# Altium PCB PCB.PcbDoc
Units mil, origin at the board's own origin, x right, y up, seen from the top; angles counter-clockwise.
Board outline 5702 x 1371 mil, 2 copper layers (Top Layer, Bottom Layer); 46 components, 42 nets, 193 pads, 66 vias.
Unrouted connection lines stored in the file: 2.
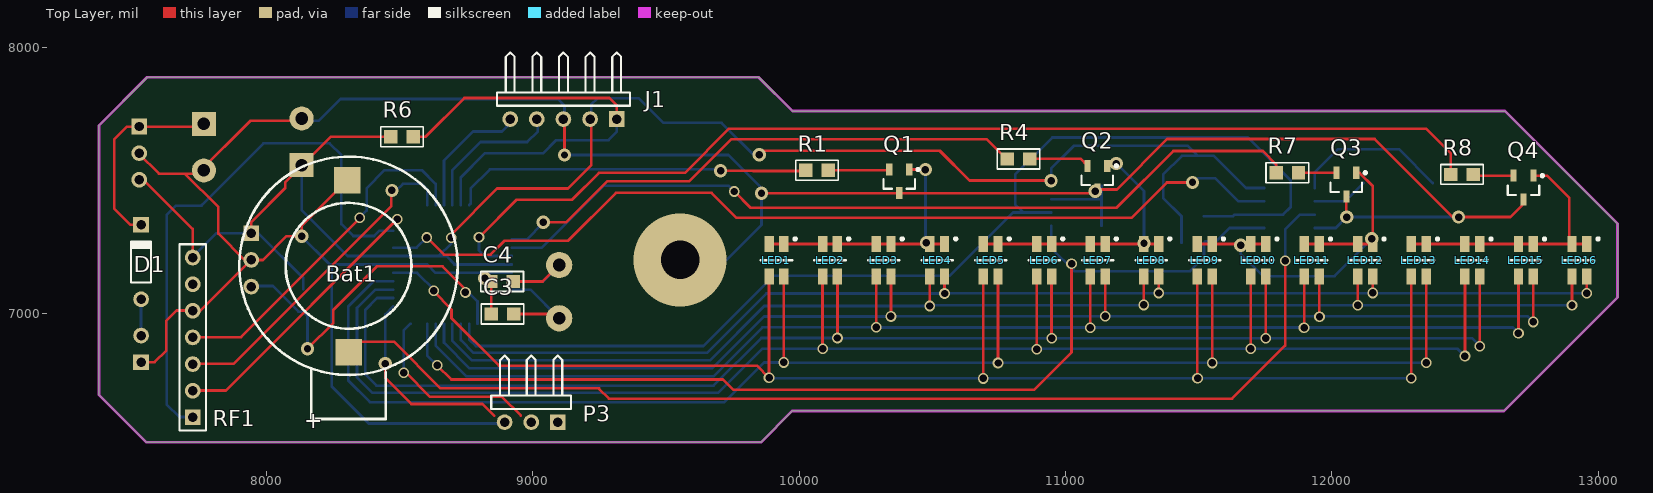
[diagram p0: Top Layer view]
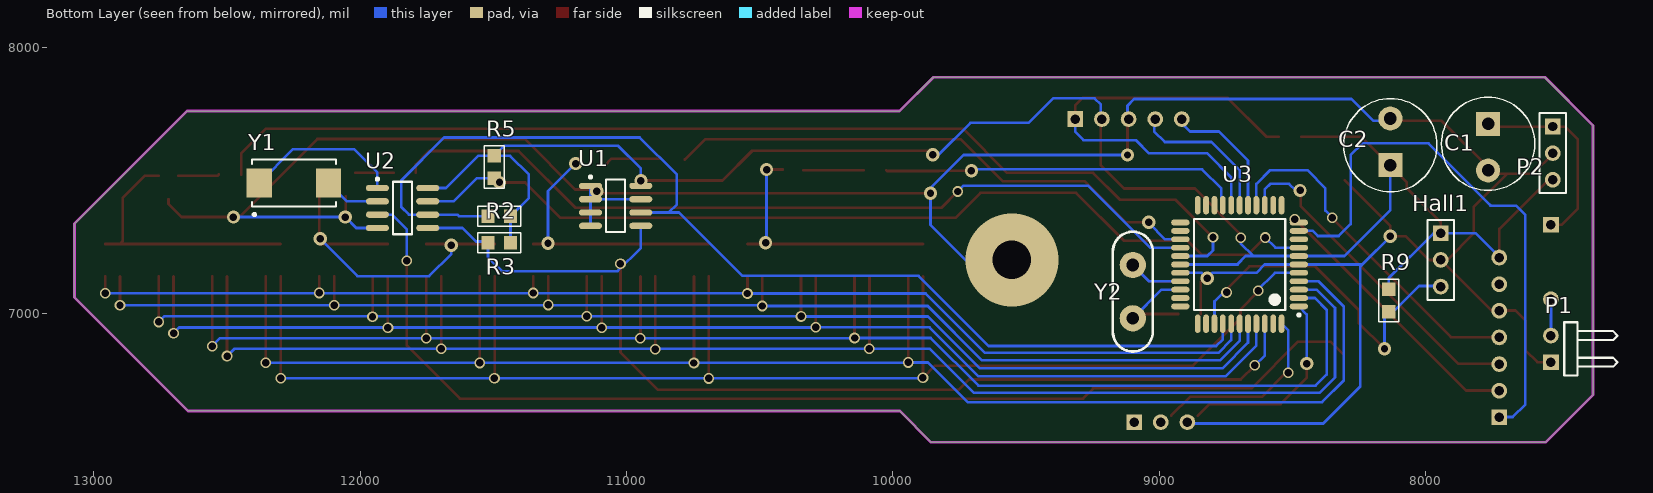
[diagram p1: Bottom Layer view, seen from below]
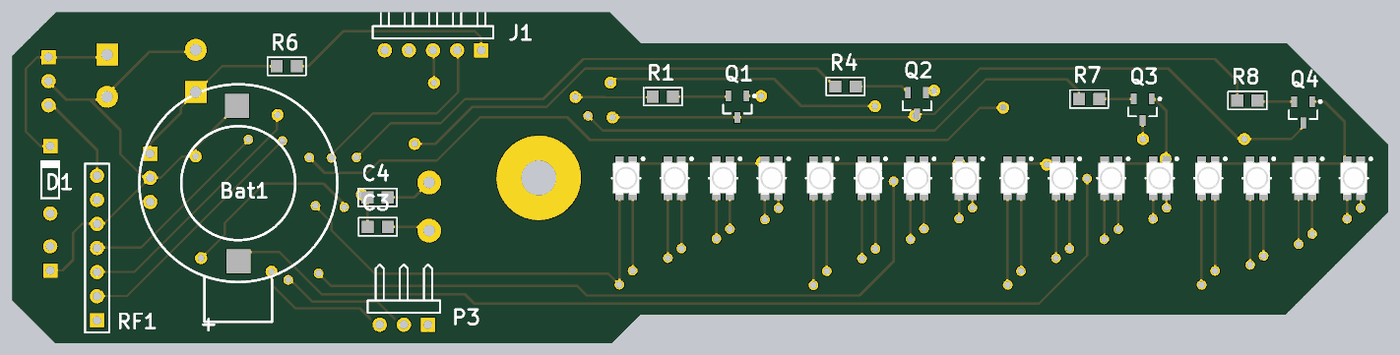
[diagram p2: 3D render of the assembled board from above, using the file's embedded part models]

## Layer stack, top to bottom
Top Layer: signal copper 1.4
Dielectric: dielectric 12.6, FR-4, Dk 4.8
Bottom Layer: signal copper 1.4

## Board outline
7371,6694 7549,6516 9856,6516 9974,6634 12647,6634 13073,7060 13073,7337 12650,7760 9975,7760 9848,7887 7552,7887 7371,7706

## Design rules (kind name [scope] priority, off if disabled: settings)
Clearance [All] p1: gap=10
PolygonConnect [All] p1: connectstyle=Relief reliefconductorwidth=10 reliefentries=4 polygonreliefangle="90 Angle" airgapwidth=10
RoutingVias [All] p1: holewidth=28 width=50 viastyle="Through Hole" minholewidth=28 minwidth=50 maxholewidth=28 maxwidth=50
SilkscreenOverComponentPads [All] p1: minsilkscreentomaskgap=10
SolderMaskExpansion [All] p1: expansion=4
Width [All] p1: maxlimit=10 minlimit=10 preferedwidth=10
27 further rules are at their usual default settings.

## Components (designator, comment, footprint, x,y, rotation, side; value= is the part's Value field where it differs from the comment)
Bat1 "Battery" BATTERY 8308,6779 r90 top
C1 "Cap Pol3" "CAP POL 2" 7765,7712 r270 bottom
C2 "Cap Pol3" "CAP POL 2" 8132,7557 r90 bottom
C3 "Cap Semi" SM/C_0805 8844,6998 r0 top
C4 "Cap Semi" SM/C_0805 8843,7120 r0 top
D1 "Diode 1N4148" DO-35 7529,7193 r90 top
Hall1 "Header 3" HDR1X3 7943,7301 r270 bottom
J1 "Programming" HDR1X5H 9315,7730 r180 top
LED1 "150141RV73100" 3528 9915,7200 r270 top
LED2 "150141RV73100" 3528 10116,7200 r270 top
LED3 "150141RV73100" 3528 10317,7200 r270 top
LED4 "150141RV73100" 3528 10518,7200 r270 top
LED5 "150141RV73100" 3528 10719,7200 r270 top
LED6 "150141RV73100" 3528 10920,7200 r270 top
LED7 "150141RV73100" 3528 11121,7200 r270 top
LED8 "150141RV73100" 3528 11322,7200 r270 top
LED9 "150141RV73100" 3528 11523,7200 r270 top
LED10 "150141RV73100" 3528 11724,7200 r270 top
LED11 "150141RV73100" 3528 11925,7200 r270 top
LED12 "150141RV73100" 3528 12126,7200 r270 top
LED13 "150141RV73100" 3528 12327,7200 r270 top
LED14 "150141RV73100" 3528 12528,7200 r270 top
LED15 "150141RV73100" 3528 12729,7200 r270 top
LED16 "150141RV73100" 3528 12930,7200 r270 top
P1 "DC 12V" HDR1X2H 7529,6817 r90 bottom
P2 "7805" HDR1X3 7522,7702 r270 bottom
P3 "Header 3H" HDR1X3H 9094,6592 r180 top
Q1 "QNPN" SOT-23B_N 10376,7496 r270 top
Q2 "QNPN" SOT-23B_N 11120,7510 r270 top
Q3 "QNPN" SOT-23B_N 12055,7484 r270 top
Q4 "QNPN" SOT-23B_N 12720,7473 r270 top
R1 "Res Semi" SM/C_0805 10109,7538 r180 top
R2 "Res Semi" SM/C_0805 11520,7365 r180 bottom
R3 "Res Semi" SM/C_0805 11520,7265 r180 bottom
R4 "Res Semi" SM/C_0805 10866,7580 r180 top
R5 "Res Semi" SM/C_0805 11497,7592 r270 bottom
R6 "Res Semi" SM/C_0805 8551,7664 r180 top
R7 "Res Semi" SM/C_0805 11875,7528 r180 top
R8 "Res Semi" SM/C_0805 12531,7522 r180 top
R9 "Res Semi" SM/C_0805 8138,7007 r90 bottom
RF1 "RF Module" HDR1X7 7723,6610 r90 top
U1 "AT24C01BN-SP25-T" 8S1_N 11041,7404 r180 bottom
U2 "DS1307Z" SOIC8N_N 11841,7396 r180 bottom
U3 "PIC16F887-E/PT" TQFP-PT44_N 8698,7184 r0 bottom
Y1 "32,768KHz" CFPX-93 12249,7490 r180 bottom
Y2 "20MHz" CRYSTAL 9099,6982 r90 bottom

## Footprints (in the part's own frame and the unit in brackets; to place one, negate y for a bottom-side part, rotate by r counter-clockwise, add the part's x,y. Pads: shape width x height; smd on the part's side, far side on the other; paste and mask are expansions set on the pad)
8S1_N [mm] "SOIC, 8-Leads, Body 4.9x3.9mm, Pitch 1.27mm, IPC Medium Density"
  oval 2.2x0.6 smd: 1(-2.4,1.905) 2(-2.4,0.635) 3(-2.4,-0.635) 4(-2.4,-1.905) 5(2.4,-1.905) 6(2.4,-0.635) 7(2.4,0.635) 8(2.4,1.905)
  silkscreen extent -2.53,-2.5 0.9,2.88, body extent -2,-2.5 2,2.5, height 1.75
3528 [mm] "Chip LED, 4-Leads, Body 2.8x3.5mm (max), Pitch 1.42mm, IPC Medium Density"
  rect 1.5x0.9 smd: 1(1.55,0.707) 2(1.55,-0.71) 3(-1.55,0.707) 4(-1.55,-0.707)
  silkscreen extent -2.15,-1.5 0.03,1.9, body extent -1.75,-1.4 1.75,1.4, height 1.87
BATTERY [mil]
  rect 100x100 smd: 1(721,5) 2(76,-1)
  silkscreen extent -175,-410 810,410
"CAP POL 2" [mil]
  rect 90.53x90.53 hole 47.23: 1(0,0)
  round 90.53 hole 47.23: 2(175,0)
  silkscreen extent -100,-175 250,175
CFPX-93 [mm] "Surface Mount Quartz Crystal; Body 8.2 x 4.7 mm (LxW max)"
  rect 2.4x2.8 smd: 1(-3.3,0) 2(3.3,0)
  silkscreen extent -4,-3.14 4,2.25
CRYSTAL [mil]
  round 98.43 hole 47.23: 1(0,0) 2(200,0)
  silkscreen extent -125,-75 325,75
DO-35 [mm] "Diode, Axial; Body 3.8 x 1.9 mm (LxDia. max), Lead Dia. 0.53 mm (max)"
  round 1.5 hole 0.9: 1(-3.55,0)
  rect 1.5x1.5 hole 0.9: 2(3.55,0)
  silkscreen extent -1.95,-0.95 2.05,0.95
HDR1X2H [mm] "Connector; Header; 2 Position; Right Angle"
  rect 1.5x1.5 hole 0.9: 1(0,0)
  round 1.5 hole 0.9: 2(2.54,0)
  silkscreen extent -1.27,-6.35 3.81,-1.27
HDR1X3 [mm] "Connector; Header; 3 Position"
  rect 1.5x1.5 hole 0.9: 1(0,0)
  round 1.5 hole 0.9: 2(2.54,0) 3(5.08,0)
  silkscreen extent -1.27,-1.27 6.35,1.27
HDR1X3H [mm] "Connector; Header; 3 Position; Right Angle"
  rect 1.5x1.5 hole 0.9: 1(0,0)
  round 1.5 hole 0.9: 2(2.54,0) 3(5.08,0)
  silkscreen extent -1.27,-6.35 6.35,-1.27
HDR1X5H [mm] "Connector; Header; 5 Position; Right Angle"
  rect 1.5x1.5 hole 0.9: 1(0,0)
  round 1.5 hole 0.9: 2(2.54,0) 3(5.08,0) 4(7.62,0) 5(10.16,0)
  silkscreen extent -1.27,-6.35 11.43,-1.27
HDR1X7 [mm] "Connector; Header; 7 Position"
  rect 1.5x1.5 hole 0.9: 1(0,0)
  round 1.5 hole 0.9: 2(2.54,0) 3(5.08,0) 4(7.62,0) 5(10.16,0) 6(12.7,0) 7(15.24,0)
  silkscreen extent -1.27,-1.27 16.51,1.27
SM/C_0805 [mil]
  rect 50x50 smd: 1(0,0) 2(84,0)
  silkscreen extent -38,-38 122,38
SOIC8N_N [mm] "SOIC, 8-Leads, Body 4.9x3.9mm, Pitch 1.27mm, IPC Medium Density"
  oval 2.2x0.6 smd: 1(-2.4,1.905) 2(-2.4,0.635) 3(-2.4,-0.635) 4(-2.4,-1.905) 5(2.4,-1.905) 6(2.4,-0.635) 7(2.4,0.635) 8(2.4,1.905)
  silkscreen extent -2.53,-2.5 0.9,2.88, body extent -2,-2.5 2,2.5, height 1.75
SOT-23B_N [mm] "SOT23, 3-Leads, Body 2.9x1.3mm, Pitch 0.95mm, Lead Span 2.4mm, IPC Medium Density"
  rect 1.15x0.6 smd: 1(-1.125,0.95) 2(-1.125,-0.95) 3(1.125,0)
  silkscreen extent -1.25,-1.5 0.7,1.93, body extent -0.7,-1.5 0.7,1.5, height 1.14
TQFP-PT44_N [mm] "Thin QFP, 44-Leads, Body 10x10mm, Pitch 0.8mm, IPC Medium Density"
  oval 1.75x0.55 smd: 1(-5.65,4) 2(-5.65,3.2) 3(-5.65,2.4) 4(-5.65,1.6) 5(-5.65,0.8) 6(-5.65,0) 7(-5.65,-0.8) 8(-5.65,-1.6) 9(-5.65,-2.4) 10(-5.65,-3.2) 11(-5.65,-4) 23(5.65,-4) 24(5.65,-3.2) 25(5.65,-2.4) 26(5.65,-1.6) 27(5.65,-0.8) 28(5.65,0) 29(5.65,0.8) 30(5.65,1.6) 31(5.65,2.4) 32(5.65,3.2) 33(5.65,4)
  oval 0.55x1.75 smd: 12(-4,-5.65) 13(-3.2,-5.65) 14(-2.4,-5.65) 15(-1.6,-5.65) 16(-0.8,-5.65) 17(0,-5.65) 18(0.8,-5.65) 19(1.6,-5.65) 20(2.4,-5.65) 21(3.2,-5.65) 22(4,-5.65) 34(4,5.65) 35(3.2,5.65) 36(2.4,5.65) 37(1.6,5.65) 38(0.8,5.65) 39(0,5.65) 40(-0.8,5.65) 41(-1.6,5.65) 42(-2.4,5.65) 43(-3.2,5.65) 44(-4,5.65)
  silkscreen extent -5.77,-4.35 4.35,4.95, body extent -5,-5 5,5, height 1.2

## Part data
C1 C2: "Polarized Capacitor (Surface Mount)"
C3 C4: "Capacitor (Semiconductor SIM Model)"
D1: "High Conductance Fast Diode"
Hall1: "Header, 3-Pin"
J1: library part "Header 5H", "Header, 5-Pin, Right Angle"
LED1 LED2 LED3 LED4 LED5 LED6 LED7 LED8 LED9 LED10 LED11 LED12 LED13 LED14 LED15 LED16: library part "WL-SBTW 3528 150141RV73100", "SMD Bi-Color Top LED, WL-SBTW, Red & Bright Green"
P1: library part "Header 2H", "Header, 2-Pin, Right Angle"
P2: library part "Header 3", "Header, 3-Pin"
P3: "Header, 3-Pin, Right Angle"
Q1 Q2 Q3 Q4: "NPN Bipolar Transistor"
R1 R2 R3 R4 R5 R6 R7 R8 R9: "Semiconductor Resistor"
RF1: library part "Header 7", "Header, 7-Pin"
U1: "1Kbit (128 x 8), 2-wire Bus Automotive Serial EEPROM with Write Protect, 2.5V, 8-Pin SOIC, Tape & Reel"
U2: "64 X 8 Serial Real-Time Clock"
U3: "Flash-Based, 8-Bit CMOS Microcontroller with nanoWatt Technology, 8K (x14-Bit words) Program Memory, 624 Bytes Data Memory, 35 I/O pins, 44-Pin TQFP, Standard VDD Range, Extended Temperature"
Y1: library part CFPX-93, "Surface Mount Quartz Crystal"
Y2: library part XTAL

## Via types
v1: diameter 40, hole 28, Top Layer to Bottom Layer, 44 vias
v2: diameter 50, hole 28, Top Layer to Bottom Layer, 21 vias
v3: diameter 350, hole 145, Top Layer to Bottom Layer, 1 vias

## Nets (pads, with @x,y where several pads share a name; then routed paths per layer and width w, separated by ;. In a path a pad name is that pad's centre, name@x,y a point inside that pad or via, vN(x,y) a via of type N, cw(c..) or ccw(c..) an arc to the next point about the centre after c; other vN are vias at no path point)
5V: C2.1 Hall1.1 J1.2 P2.3 R2.2 R3.2 R5.1 R6.2 R9.2 RF1.7 U1.8 U2.8 U3.7 U3.28 | length 6951.5
  Top Layer w10: P2.3@7522,7501 7539,7501 7723,7317 RF1.7 ; Hall1.1@7943,7303 7943,7344 8071,7472 8071,7493 8242,7664 R6.2 ; v1(8694,7284) 8694,7297 8866,7469 9132,7469 9219,7556 J1.2@9219,7752 ; v2(9850,7596) 9865,7611 10528,7611 10640,7499 10927,7499 v2@10946,7518
  Bottom Layer w10: RF1.7@7721.5,7211.5 7811,7301 Hall1.1 ; Hall1.1@7943,7303 7968,7303 8138,7133 R9.2 ; C2.1@8133,7548 8133,7387 8304.5,7215.5 U3.7 8646.5,7215.5 ; v1(8694,7284) 8694,7263 8646.5,7215.5 ; U3.28 8705,7184 8705,7186.5 8676,7215.5 8646.5,7215.5 ; J1.2@9219,7752 9219,7784 9243,7808 9398,7808 9490,7716 9709,7716 9829,7596 v2(9850,7596) ; U1.8 10946.51,7543.51 11033,7630 11459,7630 R5.1 ; R3.2 R2.2 11367,7434 11367,7522 11437,7592 R5.1 ; U2.8 11678,7471 11557,7592 R5.1
  other v2: 10946,7498
GND: Bat1.1 C1.2 C2.2 C3.1 C4.1 Hall1.2 J1.3 P1.1 P2.2 P3.3 Q1.3 Q2.3 Q3.3 Q4.3 RF1.5 U1.1 U1.2 U1.3 U1.4 U1.7 U2.4 U3.6 U3.29 | length 11070.1
  Top Layer w10: P2.2@7522,7601 7520,7601 7596,7525 7693,7525 ; P1.1 7580,6817 7624,6861 7624,6973 7662,7011 7752,7011 Hall1.2@7937.5,7196.5 ; C2.2@8132,7723 7939,7723 7741,7525 7693,7525 ; Bat1.1 8132,7329 v2(8132,7290) 8076,7290 7987,7201 Hall1.2 7918,7201 7819,7300 7819,7399 7693,7525 ; C3.1 C4.1@8844,7119 ; v2(9119,7595) J1.3@9119,7752 ; v2@9857,7450 v2(9858.71,7451.71) Q1.3 11106,7451.71 Q2.3 11192.71,7465.71 11382,7655 12161,7655 12454,7362 v2(12476,7362) 12671,7362 12720,7411 Q4.3 ; Q3.3 12055,7363 v2(12056,7362)
  Bottom Layer w10: v2@8117,7304 8245,7176 8245,6726 8384,6587 8889,6587 P3.3 ; C2.2@8132,7723 8196,7723 8278,7805 9094,7805 9119,7780 J1.3@9119,7752 ; 8237,7184 U3.6 8604,7184 8635.5,7152.5 8800,7152.5 8800,7152 v2(8820,7132) 8840.5,7152.5 U3.29 ; v2(9119,7595) 9735,7595 9858.71,7471.29 v2(9858.71,7451.71) 9858.71,7332.71 9727,7201 v3(9553,7201) ; U1.7 U1.2 ; U1.4 U1.3 U1.2 ; U1.1 U1.2 ; U2.4 12015,7321 v2(12056,7362) v2(12476,7362)
  other v2: 11112,7459
LED0: LED4.1 LED8.1 LED12.1 LED16.1 U3.38 | length 4654.5
  Top Layer w10: v1@10545.85,7075.15 LED4.1 ; v1@11349,7076 v1(11349.85,7076.85) LED8.1 ; LED12.1 12153.85,7077.15 v1(12154,7077) ; v1(12957.85,7076) LED16.1
  Bottom Layer w10: U3.38 8729.5,6900.5 8778,6852 9654,6852 9877,7075 v1(10546,7075) 10547,7076 v1(12957.85,7076)
LED1: LED4.2 LED8.2 LED12.2 LED16.2 U3.39 | length 4818.7
  Top Layer w10: v1(10490.05,7028.05) LED4.2 ; v1(11294,7032) v1(11294,7032) LED8.2 ; LED12.2 v1(12098.05,7030.95) v1@12099,7030 ; v1(12902,7031) v1(12902,7031) LED16.2
  Bottom Layer w10: U3.39 8698,6897 8771,6824 9665,6824 9869.05,7028.05 v1(10490.05,7028.05) ; v1@10490,7031 v1(12902,7031)
LED2: LED3.1 LED7.1 LED11.1 LED15.1 U3.40 | length 4914.7
  Top Layer w10: v1(10344.85,6988.85) LED3.1 ; v1@11147,6988 v1(11148.85,6989.85) LED7.1 ; LED11.1 11952.85,6989.15 v1(11954,6988) ; v1(12756.85,6968.15) LED15.1
  Bottom Layer w10: U3.40 8666.5,6890.5 8763,6794 9673,6794 9867.85,6988.85 v1(10344.85,6988.85) ; v1@10345,6989 12736,6989 v1(12756.85,6968.15)
LED3: LED3.2 LED7.2 LED11.2 LED15.2 U3.41 | length 5071
  Top Layer w10: v1(10289.05,6948.05) LED3.2 ; v1(11093.05,6946.05) v1(11093.05,6946.05) LED7.2 ; v1(11896,6946) 11897.05,6947.05 LED11.2 ; v1(12701.05,6925.95) LED15.2
  Bottom Layer w10: U3.41 8635.01,6879.99 8751,6764 9678,6764 9862.05,6948.05 v1(10289.05,6948.05) ; v1@10289,6947 12680,6947 v1(12701.05,6925.95)
LED4: LED2.1 LED6.1 LED10.1 LED14.1 U3.2 | length 5618.8
  Top Layer w10: v1@10142,6906 v1(10143.85,6907.85) LED2.1 ; LED6.1 10947.85,6907.15 v1(10948,6907) ; LED10.1 v1(11751.85,6907.15) v1@11753,6906 ; v1(12555.85,6876.85) LED14.1
  Bottom Layer w10: U3.2 8415.02,7058.02 8371,7014 8371,6771 8413,6729 9679,6729 9857.85,6907.85 v1(10143.85,6907.85) ; v1@10141,6907 v1(10948,6907) 12525.71,6907 v1(12555.85,6876.85)
LED5: LED2.2 LED6.2 LED10.2 LED14.2 U3.3 | length 5811.4
  Top Layer w10: v1@10086,6866 v1(10088.05,6868.05) LED2.2 ; v1(10892.05,6866.05) v1(10892.05,6866.05) LED6.2 ; v1@11694,6866 v1(11696.05,6868.05) LED10.2 ; v1(12500.05,6840.05) LED14.2
  Bottom Layer w10: U3.3 8408.51,7089.51 8340,7021 8340,6760.28 8398.28,6702 9696,6702 9862.05,6868.05 v1(10088.05,6868.05) ; v1@10085,6867 12473.09,6867 v1(12500.05,6840.05)
LED6: LED1.1 LED5.1 LED9.1 LED13.1 U3.4 | length 5929.6
  Top Layer w10: v1(9942,6816) 9942.85,6816.85 LED1.1 ; v1(10746.85,6814) LED5.1 ; LED9.1 v1(11550.85,6814.15) v1@11552,6813 ; v1(12354.85,6815.15) LED13.1
  Bottom Layer w10: U3.4 8402.01,7121.01 8307,7026 8307,6748 8388,6667 9719,6667 9868,6816 v1(9942,6816) ; v1@9940,6815.15 v1(12354.85,6815.15)
LED7: LED1.2 LED5.2 LED9.2 LED13.2 U3.5 | length 5550.2
  Top Layer w10: v1@8626.5,7083.5 8695,7015 8695,6982 8873,6804 9841.09,6804 v1(9887.05,6758.05) LED1.2 ; v1@10690,6755 v1(10691.05,6756.05) LED5.2 ; LED9.2 11495.05,6757.95 v1(11496,6757) ; v1(12299.05,6757.05) LED13.2
  Bottom Layer w10: U3.5 8565.5,7152.5 v1@8634,7084 ; v1@9880,6757.05 v1(12299.05,6757.05)
  other v1: 8628,7085
LED_G0: R1.2 U3.19 | length 1356.6
  Top Layer w10: v2(9705,7536) 9827,7536 9828,7535 10022,7535 R1.2
  Bottom Layer w10: U3.19 8766.66,7412.11 8766.66,7468.66 8839,7541 9700,7541 v2(9705,7536)
LED_G1: R4.2 U3.25 | length 2052.9
  Top Layer w10: v2@9035,7343 9126,7343 9279,7496 9587,7496 9745,7654 10705,7654 R4.2@10781,7578
  Bottom Layer w10: U3.25 8978.49,7278.49 9039,7339 v2(9039,7342)
LED_G2: R7.2 U3.26 | length 3141.6
  Top Layer w10: v1(9757,7458) 9818,7397 11192,7397 11405,7610 11741,7610 11791,7560 R7.2
  Bottom Layer w10: U3.26 9033.99,7246.99 9266,7479 9736,7479 v1(9757,7458)
LED_G3: R8.2 U3.27 | length 4115.9
  Top Layer w10: v1(8798,7286) 8939,7427 9147,7427 9248,7528 9571,7528 9737,7694 12354,7694 12447,7601 R8.2
  Bottom Layer w10: v1(8798,7286) 8798,7237 8819.5,7215.5 U3.27
MCLR: J1.1 R6.1 U3.18 | length 1696.4
  Top Layer w10: R6.1 8598,7664 8743,7809 9288,7809 9315,7782 J1.1
  Bottom Layer w10: U3.18 8729.5,7511.5 8819,7601 9038,7601 9088,7651 9284,7651 9315,7682 J1.1
NetBat1_2: Bat1.2 U2.3 | length 4276.2
  Top Layer w10: Bat1.2@8311,6849 8356,6894 8478,6894 8653,6719 9249,6719 9249,6717 9286,6680 ; 9285,6680 11626,6680 11825,6879 v1(11825,7198)
  Bottom Layer w10: v1(11825,7198) 11825,7316 11880,7371 U2.3
NetC1_1: C1.1 D1.2 P2.1 | length 742.8
  Top Layer w10: D1.2 7489.24,7332.76 7428,7394 7428,7654 7475,7701 C1.1@7765,7701
NetC3_2: C3.2 U3.31 Y2.1 | length 400.7
  Top Layer w10: C3.2 9083,6998 Y2.1
  Bottom Layer w10: U3.31 8991.49,7089.51 Y2.1
NetC4_2: C4.2 U3.30 Y2.2 | length 401.5
  Top Layer w10: C4.2 9037,7120 Y2.2
  Bottom Layer w10: U3.30 9038.01,7121.01 Y2.2
NetD1_1: D1.1 P1.2 | length 136.2
  Bottom Layer w10: P1.2 D1.1
NetLED1_3: LED1.3 LED1.4 LED2.3 LED2.4 LED3.3 LED3.4 LED4.3 LED4.4 Q1.1 | length 990.2
  Top Layer w10: LED1.4 LED1.3 LED2.4 LED2.3 LED3.4 LED3.3 LED4.4 LED4.3 ; Q1.1 v2(10474.29,7540.29)
  Bottom Layer w10: v2@10474.29,7269.71 v2(10474.29,7540.29)
  other v2: 10478,7266
NetLED5_3: LED5.3 LED5.4 LED6.3 LED6.4 LED7.3 LED7.4 LED8.3 LED8.4 Q2.1 | length 1000.8
  Top Layer w10: LED5.4 LED5.3 LED6.4 LED6.3 LED7.4 LED7.3 LED8.4 LED8.3
  Bottom Layer w10: v2(11191,7563) 11295,7459 v2(11295,7264)
NetLED9_3: LED9.3 LED9.4 LED10.3 LED10.4 LED11.3 LED11.4 LED12.3 LED12.4 Q3.1 | length 1430.1
  Top Layer w10: LED9.4 LED9.3 LED10.4 LED10.3 ; LED11.4 LED11.3 LED12.4 LED12.3 12153.85,7479.15 12104.71,7528.29 Q3.1
  Bottom Layer w10: v2(11658,7256) 11658,7224 11742,7140 12010,7140 v2(12150,7280)
NetLED13_3: LED13.3 LED13.4 LED14.3 LED14.4 LED15.3 LED15.4 LED16.3 LED16.4 Q4.1 | length 1004.4
  Top Layer w10: LED13.4 LED13.3 LED14.4 LED14.3 LED15.4 LED15.3 LED16.4 ; Q4.1 12807.71,7517.29 12892,7433 12892,7271.17 LED16.4 ; LED16.3 LED16.4
NetQ1_2: Q1.2 R1.1 | length 227.3
  Top Layer w10: R1.1 Q1.2@10336.31,7538
NetQ2_2: Q2.2 R4.1 | length 222.7
  Top Layer w10: R4.1@10871,7581 11055.89,7581 Q2.2
NetQ3_2: Q3.2 R7.1 | length 142.3
  Top Layer w10: R7.1@11875.29,7528.29 Q3.2
NetQ4_2: Q4.2 R8.1 | length 153.5
  Top Layer w10: R8.1 12535.71,7517.29 Q4.2
NetRF1_1: RF1.1 U3.10 | length 2094.4
  Bottom Layer w10: RF1.1@7721,6611 7673,6611 7625,6659 7625,7370 7659,7404 7757,7404 7757,7407 7989,7639 8237,7639 8281,7595 8281,7336 8326,7291 8404,7291 8422.98,7309.98 U3.10
NetRF1_2: RF1.2 U3.11 | length 1034.3
  Top Layer w10: RF1.2@7723,6711 7848,6711 v1(8491,7354)
NetRF1_3: RF1.3 U3.14 | length 1263.9
  Top Layer w10: RF1.3@7723,6811 7877,6811 8469,7403 8469,7453 v2@8477,7461
  Bottom Layer w10: v2(8471,7462) 8487,7462 8512,7487 8583,7487 8603.51,7466.49 U3.14
NetRF1_4: RF1.4 U3.15 | length 1323.2
  Top Layer w10: RF1.4@7723,6911 7905,6911 v1@8352,7358
  Bottom Layer w10: v1(8350,7360) 8376,7386 8376,7470 8444,7538 8583,7538 8635.01,7485.99 U3.15
NetU2_1: U2.1 Y1.1 | length 590.8
  Bottom Layer w10: U2.1 11935.49,7529.49 12023,7617 12251.92,7617 Y1.1
NetU2_2: U2.2 Y1.2 | length 212.2
  Bottom Layer w10: U2.2 12050.08,7421 Y1.2
PGC: J1.4 U3.17 | length 559
  Bottom Layer w10: U3.17 8698,7538 8804,7644 8979,7644 9019,7684 J1.4@9019,7730
PGD: J1.5 U3.16 | length 491.7
  Bottom Layer w10: U3.16 8666.5,7574 8775.5,7683 8884,7683 8919,7718 J1.5@8919,7730
RX: P3.2 U3.1 | length 748.6
  Top Layer w10: v2(8446,6812) 8446,6758 8544,6660 8811,6660 8855,6616
  Bottom Layer w10: v2(8446,6812) 8446,6996.96 U3.1
SCL: R2.1 U1.6 U2.6 U3.37 | length 4217
  Bottom Layer w10: U3.37 8760.99,6903.01 8786,6878 9641,6878 9904,7141 10565,7141 10803,7379 10842,7379 ; U1.6 10842,7379 ; R2.1 11629,7365 11635,7371 U2.6 11817,7371 11846,7400 11846,7500 11685,7661 10951,7661 10811,7521 10811,7410 10842,7379
SDA: R3.1 U1.5 U2.5 U3.42 | length 4005.3
  Top Layer w10: v1(8641,6805) 8694,6752 9714,6752 9753,6713 10882,6713 11023,6854 v1(11023,7187)
  Bottom Layer w10: U3.42 8603.51,6842.49 v1@8644,6802 ; U1.5 10946.51,7246.49 11034,7159 11468,7159 11520,7211 R3.1 11525,7270 11565,7270 11616,7321 U2.5
SIGHALL: Hall1.3 R9.1 U3.36 | length 1330.4
  Top Layer w10: v2(8154,6868) 8251,6965 8251,7014 8414,7177 8661,7177 8753,7085 v1(8747,7079)
  Bottom Layer w10: Hall1.3@7943,7103 8024,7103 8120.5,7006.5 8137.5,7006.5 8154,6990 v2(8154,6868) ; v1(8747,7079) 8753,7085 8792.49,7045.51 U3.36
SQW: R5.2 U2.7 U3.8 | length 3519.4
  Top Layer w10: v1(8602,7285) 8666,7221 8842,7221 8894,7273 9132,7273 9312,7453 9671,7453 9765,7359 11248,7359 11381,7492 v2(11477,7492)
  Bottom Layer w10: U3.8 8563.99,7246.99 v1(8602,7285) ; R5.2 11562,7508 11649,7421 U2.7
TX: P3.1 U3.44 | length 698.7
  Top Layer w10: v1@8519.26,6782.26 8614.52,6687 8884,6687 8955,6616
  Bottom Layer w10: v1(8515,6778) 8515,6936.04 U3.44
pads on no net: RF1.6 U3.9 U3.12 U3.13 U3.20 U3.21 U3.22 U3.23 U3.24 U3.32 U3.33 U3.34 U3.35 U3.43

## Keep-outs
Keep-Out Layer:
  the board outline again, w10

## Silkscreen, mask and mechanical layers (free items; w line width, h text height)
Top Overlay:
  text "+" at 8141,6569 h60